# Altium PCB KUOZHAN.PCBDOC (part 2 of 21)
Units mm, origin at the board's own origin, x right, y up, seen from the top; angles counter-clockwise.
Board outline 165.51 x 116.38 mm, 2 copper layers (Top Layer, Bottom Layer); 171 components, 245 nets, 894 pads, 298 vias.
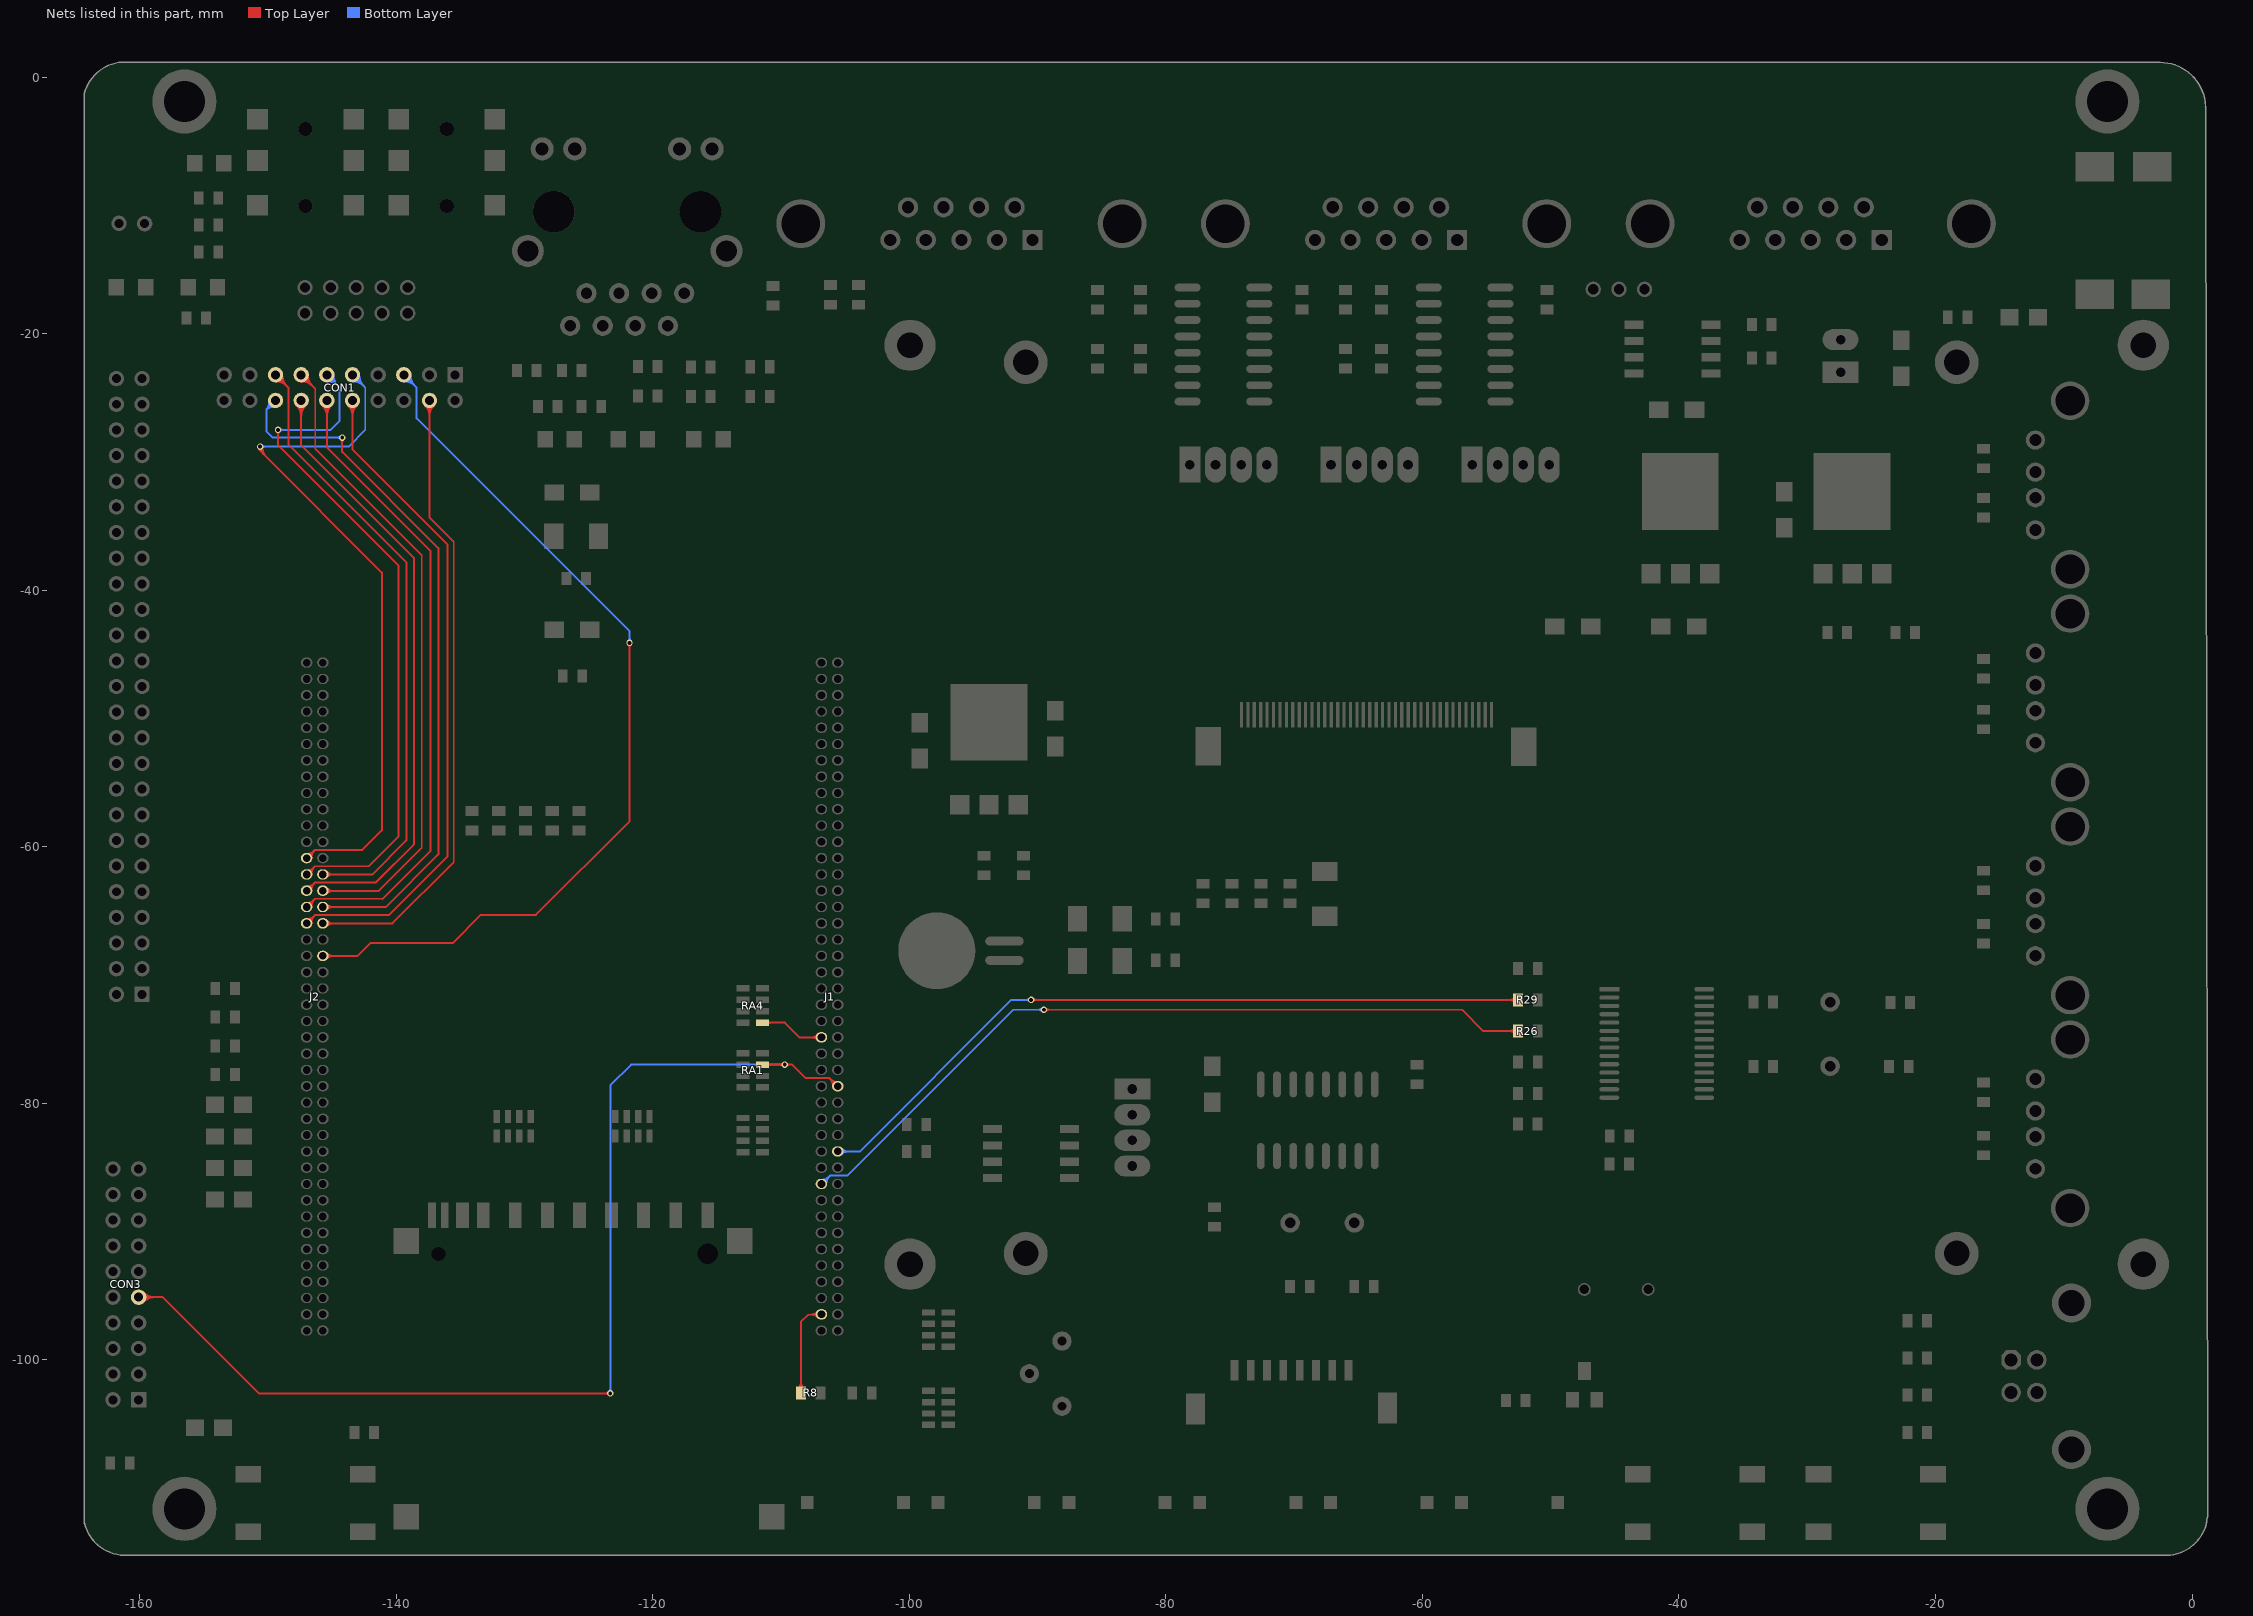
[diagram p2: the nets of this part, all layers, seen from the top]

## Via types
v1: diameter 0.5, hole 0.3, Top Layer to Bottom Layer, 272 vias
v2: diameter 0.6, hole 0.3, Top Layer to Bottom Layer, 24 vias
v3: diameter 0.9, hole 0.9, Top Layer to Bottom Layer, 2 vias

## Nets (pads, with @x,y where several pads share a name; then routed paths per layer and width w, separated by ;. In a path a pad name is that pad's centre, name@x,y a point inside that pad or via, vN(x,y) a via of type N, cw(c..) or ccw(c..) an arc to the next point about the centre after c; other vN are vias at no path point) (continued)
CAMCLK: CON1.5 J2.38 | length 102.6
  Top Layer w0.15: J2.38@-145.703,-68.514 -143.014,-68.514 -142,-67.5 -135.6,-67.5 -133.4,-65.3 -129.1,-65.3 -121.8,-58 v1(-121.8,-44.1) ; v1@-121.888,-44.188 cw(c-122.102,-44.402) -121.8,-44.402 cw(c-121.498,-44.402) v1@-121.712,-44.188 ; J2.38@-145.579,-68.638 cw(c-145.28,-68.937) J2.38@-145.28,-68.514 ; J2.38@-145.579,-68.638 cw(c-145.28,-68.937) J2.38@-145.28,-68.514 ; J2.38@-145.579,-68.638 cw(c-145.28,-68.937) J2.38@-145.28,-68.514 ; J2.38@-145.579,-68.39 ccw(c-145.28,-68.092) J2.38@-145.28,-68.514 ; J2.38@-145.579,-68.39 ccw(c-145.28,-68.092) J2.38@-145.28,-68.514 ; J2.38@-145.579,-68.39 ccw(c-145.28,-68.092) J2.38@-145.28,-68.514 ; J2.38@-145.473,-68.744 cw(c-144.918,-69.299) -144.918,-68.514 ; J2.38@-145.473,-68.744 cw(c-144.918,-69.299) -144.918,-68.514 ; J2.38@-145.473,-68.744 cw(c-144.918,-69.299) -144.918,-68.514 ; J2.38@-145.473,-68.284 ccw(c-144.918,-67.73) -144.918,-68.514 ; J2.38@-145.473,-68.284 ccw(c-144.918,-67.73) -144.918,-68.514 ; J2.38@-145.473,-68.284 ccw(c-144.918,-67.73) -144.918,-68.514 ; v1@-121.924,-44.224 cw(c-122.222,-44.522) -121.8,-44.522 ; v1@-121.924,-44.224 cw(c-122.222,-44.522) -121.8,-44.522 ; v1@-121.924,-44.224 cw(c-122.222,-44.522) -121.8,-44.522 ; v1@-121.924,-44.224 cw(c-122.222,-44.522) -121.8,-44.522 ; -121.8,-44.522 cw(c-121.378,-44.522) v1@-121.676,-44.224 ; -121.8,-44.522 cw(c-121.378,-44.522) v1@-121.676,-44.224 ; -121.8,-44.522 cw(c-121.378,-44.522) v1@-121.676,-44.224 ; -121.8,-44.522 cw(c-121.378,-44.522) v1@-121.676,-44.224 ; J2.38@-145.529,-68.376 ccw(c-145.194,-68.041) -145.194,-68.514 cw(c-145.194,-68.041) J2.38@-145.529,-68.376 ; J2.38@-145.423,-68.729 cw(c-144.904,-69.248) -144.904,-68.514 ccw(c-144.904,-69.248) J2.38@-145.423,-68.729 ; J2.38@-145.423,-68.27 ccw(c-144.832,-67.679) -144.832,-68.514 cw(c-144.832,-67.679) J2.38@-145.423,-68.27
  Bottom Layer w0.15: CON1.5@-139.394,-23.203 -138.4,-24.196 -138.4,-26.6 -121.8,-43.2 v1(-121.8,-44.1) ; v1@-121.888,-44.012 ccw(c-122.102,-43.798) -121.8,-43.798 ccw(c-121.498,-43.798) v1@-121.712,-44.012 ; CON1.5@-139.394,-23.728 cw(c-139.394,-24.995) -138.497,-24.099 ; CON1.5@-139.394,-23.728 cw(c-139.394,-24.995) -138.497,-24.099 ; CON1.5@-139.394,-23.728 cw(c-139.394,-24.995) -138.497,-24.099 ; CON1.5@-139.394,-23.728 cw(c-139.394,-24.995) -138.497,-24.099 ; CON1.5@-139.394,-23.728 cw(c-139.394,-24.995) -138.497,-24.099 ; CON1.5@-139.394,-23.578 cw(c-139.394,-24.483) -138.753,-23.843 ; CON1.5@-139.394,-23.578 cw(c-139.394,-24.483) -138.753,-23.843 ; CON1.5@-139.394,-23.578 cw(c-139.394,-24.483) -138.753,-23.843 ; CON1.5@-139.394,-23.578 cw(c-139.394,-24.483) -138.753,-23.843 ; CON1.5@-139.394,-23.578 cw(c-139.394,-24.483) -138.753,-23.843 ; CON1.5@-139.019,-23.203 ccw(c-138.113,-23.203) -138.753,-23.843 ; CON1.5@-139.019,-23.203 ccw(c-138.113,-23.203) -138.753,-23.843 ; CON1.5@-139.019,-23.203 ccw(c-138.113,-23.203) -138.753,-23.843 ; CON1.5@-139.019,-23.203 ccw(c-138.113,-23.203) -138.753,-23.843 ; CON1.5@-139.019,-23.203 ccw(c-138.113,-23.203) -138.753,-23.843 ; CON1.5@-138.869,-23.203 ccw(c-137.601,-23.203) -138.497,-24.099 ; CON1.5@-138.869,-23.203 ccw(c-137.601,-23.203) -138.497,-24.099 ; CON1.5@-138.869,-23.203 ccw(c-137.601,-23.203) -138.497,-24.099 ; CON1.5@-138.869,-23.203 ccw(c-137.601,-23.203) -138.497,-24.099 ; CON1.5@-138.869,-23.203 ccw(c-137.601,-23.203) -138.497,-24.099 ; v1@-121.924,-43.976 ccw(c-122.222,-43.678) -121.8,-43.678 ; v1@-121.924,-43.976 ccw(c-122.222,-43.678) -121.8,-43.678 ; v1@-121.924,-43.976 ccw(c-122.222,-43.678) -121.8,-43.678 ; v1@-121.924,-43.976 ccw(c-122.222,-43.678) -121.8,-43.678 ; -121.8,-43.678 ccw(c-121.378,-43.678) v1@-121.676,-43.976 ; -121.8,-43.678 ccw(c-121.378,-43.678) v1@-121.676,-43.976 ; -121.8,-43.678 ccw(c-121.378,-43.678) v1@-121.676,-43.976 ; -121.8,-43.678 ccw(c-121.378,-43.678) v1@-121.676,-43.976
CAMDATA0: CON1.16 J2.32 | length 81.6
  Top Layer w0.15: J2.32@-145.703,-64.702 -140.815,-64.702 -136.7,-60.586 -136.7,-36.713 -144.2,-29.213 v1(-144.2,-28.1) ; v1@-144.288,-28.188 cw(c-144.502,-28.402) -144.2,-28.402 cw(c-143.898,-28.402) v1@-144.112,-28.188 ; J2.32@-145.579,-64.825 cw(c-145.28,-65.124) J2.32@-145.28,-64.702 ; J2.32@-145.579,-64.825 cw(c-145.28,-65.124) J2.32@-145.28,-64.702 ; J2.32@-145.579,-64.825 cw(c-145.28,-65.124) J2.32@-145.28,-64.702 ; J2.32@-145.579,-64.578 ccw(c-145.28,-64.279) J2.32@-145.28,-64.702 ; J2.32@-145.579,-64.578 ccw(c-145.28,-64.279) J2.32@-145.28,-64.702 ; J2.32@-145.579,-64.578 ccw(c-145.28,-64.279) J2.32@-145.28,-64.702 ; J2.32@-145.473,-64.931 cw(c-144.918,-65.486) -144.918,-64.702 ; J2.32@-145.473,-64.931 cw(c-144.918,-65.486) -144.918,-64.702 ; J2.32@-145.473,-64.931 cw(c-144.918,-65.486) -144.918,-64.702 ; J2.32@-145.473,-64.472 ccw(c-144.918,-63.917) -144.918,-64.702 ; J2.32@-145.473,-64.472 ccw(c-144.918,-63.917) -144.918,-64.702 ; J2.32@-145.473,-64.472 ccw(c-144.918,-63.917) -144.918,-64.702 ; v1@-144.324,-28.224 cw(c-144.622,-28.522) -144.2,-28.522 ; v1@-144.324,-28.224 cw(c-144.622,-28.522) -144.2,-28.522 ; v1@-144.324,-28.224 cw(c-144.622,-28.522) -144.2,-28.522 ; v1@-144.324,-28.224 cw(c-144.622,-28.522) -144.2,-28.522 ; -144.2,-28.522 cw(c-143.778,-28.522) v1@-144.076,-28.224 ; -144.2,-28.522 cw(c-143.778,-28.522) v1@-144.076,-28.224 ; -144.2,-28.522 cw(c-143.778,-28.522) v1@-144.076,-28.224 ; -144.2,-28.522 cw(c-143.778,-28.522) v1@-144.076,-28.224 ; J2.32@-145.529,-64.566 ccw(c-145.201,-64.237) -145.201,-64.702 cw(c-145.201,-64.237) J2.32@-145.529,-64.566 ; J2.32@-145.423,-64.919 cw(c-144.898,-65.444) -144.898,-64.702 ccw(c-144.898,-65.444) J2.32@-145.423,-64.919 ; J2.32@-145.423,-64.46 ccw(c-144.839,-63.875) -144.839,-64.702 cw(c-144.839,-63.875) J2.32@-145.423,-64.46
  Bottom Layer w0.15: CON1.16@-149.394,-25.203 -150.1,-25.909 ; v1@-144.288,-28.188 ccw(c-144.502,-28.402) -144.502,-28.1 ccw(c-144.502,-27.798) v1@-144.288,-28.012 ; v1(-144.2,-28.1) -149.6,-28.1 -150.1,-27.6 -150.1,-25.909 ; -150.1,-25.909 cw(c-149.614,-26.395) CON1.16@-149.489,-25.719 ; -150.1,-25.909 ccw(c-150.586,-25.423) CON1.16@-149.91,-25.298 ; -150.1,-25.909 cw(c-149.614,-26.395) CON1.16@-149.489,-25.719 ; -150.1,-25.909 ccw(c-150.586,-25.423) CON1.16@-149.91,-25.298 ; -150.1,-25.909 cw(c-149.614,-26.395) CON1.16@-149.489,-25.719 ; -150.1,-25.909 ccw(c-150.586,-25.423) CON1.16@-149.91,-25.298 ; -150.1,-25.909 cw(c-149.614,-26.395) CON1.16@-149.489,-25.719 ; -150.1,-25.909 ccw(c-150.586,-25.423) CON1.16@-149.91,-25.298 ; -150.1,-25.909 ccw(c-150.586,-25.423) CON1.16@-149.91,-25.298 ; -150.1,-25.909 cw(c-149.614,-26.395) CON1.16@-149.489,-25.719 ; -149.898,-25.707 cw(c-149.551,-26.055) CON1.16@-149.462,-25.571 ; -149.898,-25.707 ccw(c-150.246,-25.36) CON1.16@-149.762,-25.271 ; -149.898,-25.707 cw(c-149.551,-26.055) CON1.16@-149.462,-25.571 ; -149.898,-25.707 ccw(c-150.246,-25.36) CON1.16@-149.762,-25.271 ; -149.898,-25.707 cw(c-149.551,-26.055) CON1.16@-149.462,-25.571 ; -149.898,-25.707 ccw(c-150.246,-25.36) CON1.16@-149.762,-25.271 ; -149.898,-25.707 cw(c-149.551,-26.055) CON1.16@-149.462,-25.571 ; -149.898,-25.707 ccw(c-150.246,-25.36) CON1.16@-149.762,-25.271 ; -149.898,-25.707 ccw(c-150.246,-25.36) CON1.16@-149.762,-25.271 ; -149.898,-25.707 cw(c-149.551,-26.055) CON1.16@-149.462,-25.571 ; -144.622,-28.1 cw(c-144.622,-28.522) v1@-144.324,-28.224 ; -144.622,-28.1 ccw(c-144.622,-27.678) v1@-144.324,-27.976 ; -144.622,-28.1 cw(c-144.622,-28.522) v1@-144.324,-28.224 ; -144.622,-28.1 ccw(c-144.622,-27.678) v1@-144.324,-27.976 ; -144.622,-28.1 cw(c-144.622,-28.522) v1@-144.324,-28.224 ; -144.622,-28.1 ccw(c-144.622,-27.678) v1@-144.324,-27.976 ; -144.622,-28.1 ccw(c-144.622,-27.678) v1@-144.324,-27.976 ; -144.622,-28.1 cw(c-144.622,-28.522) v1@-144.324,-28.224
CAMDATA1: CON1.15 J2.28 | length 74.1
  Top Layer w0.15: CON1.15@-149.394,-23.203 -148.4,-24.196 -148.4,-28.633 -139.2,-37.833 -139.2,-59.492 -141.868,-62.16 J2.28@-145.703,-62.16 ; CON1.15@-149.394,-23.728 cw(c-149.394,-24.995) -148.497,-24.099 ; CON1.15@-149.394,-23.728 cw(c-149.394,-24.995) -148.497,-24.099 ; CON1.15@-149.394,-23.728 cw(c-149.394,-24.995) -148.497,-24.099 ; CON1.15@-149.394,-23.728 cw(c-149.394,-24.995) -148.497,-24.099 ; CON1.15@-149.394,-23.728 cw(c-149.394,-24.995) -148.497,-24.099 ; CON1.15@-149.394,-23.578 cw(c-149.394,-24.483) -148.753,-23.843 ; CON1.15@-149.394,-23.578 cw(c-149.394,-24.483) -148.753,-23.843 ; CON1.15@-149.394,-23.578 cw(c-149.394,-24.483) -148.753,-23.843 ; CON1.15@-149.394,-23.578 cw(c-149.394,-24.483) -148.753,-23.843 ; CON1.15@-149.394,-23.578 cw(c-149.394,-24.483) -148.753,-23.843 ; CON1.15@-149.019,-23.203 ccw(c-148.113,-23.203) -148.753,-23.843 ; CON1.15@-149.019,-23.203 ccw(c-148.113,-23.203) -148.753,-23.843 ; CON1.15@-149.019,-23.203 ccw(c-148.113,-23.203) -148.753,-23.843 ; CON1.15@-149.019,-23.203 ccw(c-148.113,-23.203) -148.753,-23.843 ; CON1.15@-149.019,-23.203 ccw(c-148.113,-23.203) -148.753,-23.843 ; CON1.15@-148.869,-23.203 ccw(c-147.601,-23.203) -148.497,-24.099 ; CON1.15@-148.869,-23.203 ccw(c-147.601,-23.203) -148.497,-24.099 ; CON1.15@-148.869,-23.203 ccw(c-147.601,-23.203) -148.497,-24.099 ; CON1.15@-148.869,-23.203 ccw(c-147.601,-23.203) -148.497,-24.099 ; CON1.15@-148.869,-23.203 ccw(c-147.601,-23.203) -148.497,-24.099 ; J2.28@-145.579,-62.284 cw(c-145.28,-62.582) J2.28@-145.28,-62.16 ; J2.28@-145.579,-62.284 cw(c-145.28,-62.582) J2.28@-145.28,-62.16 ; J2.28@-145.579,-62.284 cw(c-145.28,-62.582) J2.28@-145.28,-62.16 ; J2.28@-145.579,-62.036 ccw(c-145.28,-61.737) J2.28@-145.28,-62.16 ; J2.28@-145.579,-62.036 ccw(c-145.28,-61.737) J2.28@-145.28,-62.16 ; J2.28@-145.579,-62.036 ccw(c-145.28,-61.737) J2.28@-145.28,-62.16 ; J2.28@-145.473,-62.39 cw(c-144.918,-62.944) -144.918,-62.16 ; J2.28@-145.473,-62.39 cw(c-144.918,-62.944) -144.918,-62.16 ; J2.28@-145.473,-62.39 cw(c-144.918,-62.944) -144.918,-62.16 ; J2.28@-145.473,-61.93 ccw(c-144.918,-61.375) -144.918,-62.16 ; J2.28@-145.473,-61.93 ccw(c-144.918,-61.375) -144.918,-62.16 ; J2.28@-145.473,-61.93 ccw(c-144.918,-61.375) -144.918,-62.16 ; J2.28@-145.529,-62.026 ccw(c-145.205,-61.702) -145.205,-62.16 cw(c-145.205,-61.702) J2.28@-145.529,-62.026 ; J2.28@-145.423,-62.379 cw(c-144.893,-62.909) -144.893,-62.16 ccw(c-144.893,-62.909) J2.28@-145.423,-62.379 ; J2.28@-145.423,-61.92 ccw(c-144.843,-61.34) -144.843,-62.16 cw(c-144.843,-61.34) J2.28@-145.423,-61.92
CAMDATA2: CON1.14 J2.29 | length 78.3
  Top Layer w0.15: CON1.14@-147.394,-25.203 -147.394,-28.706 -138.6,-37.5 -138.6,-59.797 -141.603,-62.8 ; J2.29@-146.973,-63.431 -146.342,-62.8 ; J2.29@-146.973,-63.419 -146.348,-62.794 ; -141.608,-62.794 -146.348,-62.794 ; CON1.14@-147.765,-25.574 cw(c-148.661,-26.47) -147.394,-26.47 ; CON1.14@-147.765,-25.574 cw(c-148.661,-26.47) -147.394,-26.47 ; CON1.14@-147.765,-25.574 cw(c-148.661,-26.47) -147.394,-26.47 ; CON1.14@-147.765,-25.574 cw(c-148.661,-26.47) -147.394,-26.47 ; CON1.14@-147.765,-25.574 cw(c-148.661,-26.47) -147.394,-26.47 ; CON1.14@-147.659,-25.468 cw(c-148.299,-26.108) -147.394,-26.108 ; CON1.14@-147.659,-25.468 cw(c-148.299,-26.108) -147.394,-26.108 ; CON1.14@-147.659,-25.468 cw(c-148.299,-26.108) -147.394,-26.108 ; CON1.14@-147.659,-25.468 cw(c-148.299,-26.108) -147.394,-26.108 ; CON1.14@-147.659,-25.468 cw(c-148.299,-26.108) -147.394,-26.108 ; -147.394,-26.47 cw(c-146.126,-26.47) CON1.14@-147.022,-25.574 ; -147.394,-26.47 cw(c-146.126,-26.47) CON1.14@-147.022,-25.574 ; -147.394,-26.47 cw(c-146.126,-26.47) CON1.14@-147.022,-25.574 ; -147.394,-26.47 cw(c-146.126,-26.47) CON1.14@-147.022,-25.574 ; -147.394,-26.47 cw(c-146.126,-26.47) CON1.14@-147.022,-25.574 ; -147.394,-26.108 cw(c-146.488,-26.108) CON1.14@-147.128,-25.468 ; -147.394,-26.108 cw(c-146.488,-26.108) CON1.14@-147.128,-25.468 ; -147.394,-26.108 cw(c-146.488,-26.108) CON1.14@-147.128,-25.468 ; -147.394,-26.108 cw(c-146.488,-26.108) CON1.14@-147.128,-25.468 ; -147.394,-26.108 cw(c-146.488,-26.108) CON1.14@-147.128,-25.468 ; J2.29@-146.973,-63.256 ccw(c-146.973,-62.833) J2.29@-146.674,-63.132 ; J2.29@-146.973,-63.256 ccw(c-146.973,-62.833) J2.29@-146.674,-63.132 ; J2.29@-146.973,-63.256 ccw(c-146.973,-62.833) J2.29@-146.674,-63.132 ; J2.29@-146.973,-63.106 ccw(c-146.973,-62.321) -146.418,-62.876 ; J2.29@-146.973,-63.106 ccw(c-146.973,-62.321) -146.418,-62.876 ; J2.29@-146.973,-63.106 ccw(c-146.973,-62.321) -146.418,-62.876 ; J2.29@-146.923,-63.094 ccw(c-146.923,-62.403) -146.434,-62.892 cw(c-146.923,-62.403) J2.29@-146.923,-63.094 ; J2.29@-146.923,-63.094 ccw(c-146.923,-62.43) -146.453,-62.9 cw(c-146.923,-62.43) J2.29@-146.923,-63.094 ; J2.29@-146.798,-63.431 cw(c-146.375,-63.431) J2.29@-146.674,-63.132 ; J2.29@-146.798,-63.431 cw(c-146.375,-63.431) J2.29@-146.674,-63.132 ; J2.29@-146.798,-63.431 cw(c-146.375,-63.431) J2.29@-146.674,-63.132 ; J2.29@-146.648,-63.431 cw(c-145.863,-63.431) -146.418,-62.876 ; J2.29@-146.648,-63.431 cw(c-145.863,-63.431) -146.418,-62.876 ; J2.29@-146.648,-63.431 cw(c-145.863,-63.431) -146.418,-62.876 ; -146.348,-62.794 ccw(c-145.744,-63.398) -146.598,-63.414 cw(c-145.744,-63.398) -146.348,-62.794 ; -146.342,-62.8 ccw(c-145.725,-63.417) -146.598,-63.419 cw(c-145.725,-63.417) -146.342,-62.8 ; J2.29@-146.748,-63.419 cw(c-146.235,-63.418) -146.598,-63.055 ccw(c-146.235,-63.418) J2.29@-146.748,-63.419 ; J2.29@-146.748,-63.416 cw(c-146.235,-63.407) -146.598,-63.044 ccw(c-146.235,-63.407) J2.29@-146.748,-63.416
CAMDATA3: CON1.13 J2.30 | length 75.8
  Top Layer w0.15: CON1.13@-147.394,-23.203 -146.3,-24.296 -146.3,-28.951 -138,-37.251 -138,-60.089 -141.342,-63.431 J2.30@-145.703,-63.431 ; CON1.13@-147.394,-23.728 cw(c-147.394,-24.995) -146.497,-24.099 ; CON1.13@-147.394,-23.728 cw(c-147.394,-24.995) -146.497,-24.099 ; CON1.13@-147.394,-23.728 cw(c-147.394,-24.995) -146.497,-24.099 ; CON1.13@-147.394,-23.728 cw(c-147.394,-24.995) -146.497,-24.099 ; CON1.13@-147.394,-23.728 cw(c-147.394,-24.995) -146.497,-24.099 ; CON1.13@-147.394,-23.578 cw(c-147.394,-24.483) -146.753,-23.843 ; CON1.13@-147.394,-23.578 cw(c-147.394,-24.483) -146.753,-23.843 ; CON1.13@-147.394,-23.578 cw(c-147.394,-24.483) -146.753,-23.843 ; CON1.13@-147.394,-23.578 cw(c-147.394,-24.483) -146.753,-23.843 ; CON1.13@-147.394,-23.578 cw(c-147.394,-24.483) -146.753,-23.843 ; CON1.13@-147.019,-23.203 ccw(c-146.113,-23.203) -146.753,-23.843 ; CON1.13@-147.019,-23.203 ccw(c-146.113,-23.203) -146.753,-23.843 ; CON1.13@-147.019,-23.203 ccw(c-146.113,-23.203) -146.753,-23.843 ; CON1.13@-147.019,-23.203 ccw(c-146.113,-23.203) -146.753,-23.843 ; CON1.13@-147.019,-23.203 ccw(c-146.113,-23.203) -146.753,-23.843 ; CON1.13@-146.869,-23.203 ccw(c-145.601,-23.203) -146.497,-24.099 ; CON1.13@-146.869,-23.203 ccw(c-145.601,-23.203) -146.497,-24.099 ; CON1.13@-146.869,-23.203 ccw(c-145.601,-23.203) -146.497,-24.099 ; CON1.13@-146.869,-23.203 ccw(c-145.601,-23.203) -146.497,-24.099 ; CON1.13@-146.869,-23.203 ccw(c-145.601,-23.203) -146.497,-24.099 ; J2.30@-145.579,-63.554 cw(c-145.28,-63.853) J2.30@-145.28,-63.431 ; J2.30@-145.579,-63.554 cw(c-145.28,-63.853) J2.30@-145.28,-63.431 ; J2.30@-145.579,-63.554 cw(c-145.28,-63.853) J2.30@-145.28,-63.431 ; J2.30@-145.579,-63.307 ccw(c-145.28,-63.008) J2.30@-145.28,-63.431 ; J2.30@-145.579,-63.307 ccw(c-145.28,-63.008) J2.30@-145.28,-63.431 ; J2.30@-145.579,-63.307 ccw(c-145.28,-63.008) J2.30@-145.28,-63.431 ; J2.30@-145.473,-63.661 cw(c-144.918,-64.215) -144.918,-63.431 ; J2.30@-145.473,-63.661 cw(c-144.918,-64.215) -144.918,-63.431 ; J2.30@-145.473,-63.661 cw(c-144.918,-64.215) -144.918,-63.431 ; J2.30@-145.473,-63.201 ccw(c-144.918,-62.646) -144.918,-63.431 ; J2.30@-145.473,-63.201 ccw(c-144.918,-62.646) -144.918,-63.431 ; J2.30@-145.473,-63.201 ccw(c-144.918,-62.646) -144.918,-63.431 ; J2.30@-145.529,-63.296 ccw(c-145.203,-62.97) -145.203,-63.431 cw(c-145.203,-62.97) J2.30@-145.529,-63.296 ; J2.30@-145.423,-63.649 cw(c-144.896,-64.177) -144.896,-63.431 ccw(c-144.896,-64.177) J2.30@-145.423,-63.649 ; J2.30@-145.423,-63.19 ccw(c-144.841,-62.607) -144.841,-63.431 cw(c-144.841,-62.607) J2.30@-145.423,-63.19
CAMDATA4: CON1.12 J2.31 | length 80.1
  Top Layer w0.15: J2.31@-146.973,-64.702 -146.348,-64.077 ; J2.31@-146.973,-64.689 -146.328,-64.044 -141.106,-64.044 ; CON1.12@-145.394,-25.203 -145.394,-28.868 -137.3,-36.962 -137.3,-60.303 -141.074,-64.077 ; J2.31@-146.973,-64.527 ccw(c-146.973,-64.104) J2.31@-146.674,-64.403 ; J2.31@-146.973,-64.527 ccw(c-146.973,-64.104) J2.31@-146.674,-64.403 ; J2.31@-146.973,-64.527 ccw(c-146.973,-64.104) J2.31@-146.674,-64.403 ; J2.31@-146.973,-64.377 ccw(c-146.973,-63.592) -146.418,-64.147 ; J2.31@-146.973,-64.377 ccw(c-146.973,-63.592) -146.418,-64.147 ; J2.31@-146.973,-64.377 ccw(c-146.973,-63.592) -146.418,-64.147 ; J2.31@-146.923,-64.364 ccw(c-146.923,-63.671) -146.432,-64.161 cw(c-146.923,-63.671) J2.31@-146.923,-64.364 ; J2.31@-146.923,-64.364 ccw(c-146.923,-63.7) -146.453,-64.17 cw(c-146.923,-63.7) J2.31@-146.923,-64.364 ; J2.31@-146.798,-64.702 cw(c-146.375,-64.702) J2.31@-146.674,-64.403 ; J2.31@-146.798,-64.702 cw(c-146.375,-64.702) J2.31@-146.674,-64.403 ; J2.31@-146.798,-64.702 cw(c-146.375,-64.702) J2.31@-146.674,-64.403 ; J2.31@-146.648,-64.702 cw(c-145.863,-64.702) -146.418,-64.147 ; J2.31@-146.648,-64.702 cw(c-145.863,-64.702) -146.418,-64.147 ; J2.31@-146.648,-64.702 cw(c-145.863,-64.702) -146.418,-64.147 ; -146.348,-64.077 ccw(c-145.744,-64.68) -146.598,-64.687 cw(c-145.744,-64.68) -146.348,-64.077 ; CON1.12@-145.765,-25.574 cw(c-146.661,-26.47) -145.394,-26.47 ; CON1.12@-145.765,-25.574 cw(c-146.661,-26.47) -145.394,-26.47 ; CON1.12@-145.765,-25.574 cw(c-146.661,-26.47) -145.394,-26.47 ; CON1.12@-145.765,-25.574 cw(c-146.661,-26.47) -145.394,-26.47 ; CON1.12@-145.765,-25.574 cw(c-146.661,-26.47) -145.394,-26.47 ; CON1.12@-145.659,-25.468 cw(c-146.299,-26.108) -145.394,-26.108 ; CON1.12@-145.659,-25.468 cw(c-146.299,-26.108) -145.394,-26.108 ; CON1.12@-145.659,-25.468 cw(c-146.299,-26.108) -145.394,-26.108 ; CON1.12@-145.659,-25.468 cw(c-146.299,-26.108) -145.394,-26.108 ; CON1.12@-145.659,-25.468 cw(c-146.299,-26.108) -145.394,-26.108 ; -145.394,-26.47 cw(c-144.126,-26.47) CON1.12@-145.022,-25.574 ; -145.394,-26.47 cw(c-144.126,-26.47) CON1.12@-145.022,-25.574 ; -145.394,-26.47 cw(c-144.126,-26.47) CON1.12@-145.022,-25.574 ; -145.394,-26.47 cw(c-144.126,-26.47) CON1.12@-145.022,-25.574 ; -145.394,-26.47 cw(c-144.126,-26.47) CON1.12@-145.022,-25.574 ; -145.394,-26.108 cw(c-144.488,-26.108) CON1.12@-145.128,-25.468 ; -145.394,-26.108 cw(c-144.488,-26.108) CON1.12@-145.128,-25.468 ; -145.394,-26.108 cw(c-144.488,-26.108) CON1.12@-145.128,-25.468 ; -145.394,-26.108 cw(c-144.488,-26.108) CON1.12@-145.128,-25.468 ; -145.394,-26.108 cw(c-144.488,-26.108) CON1.12@-145.128,-25.468 ; J2.31@-146.748,-64.689 cw(c-146.205,-64.689) -146.589,-64.305 ccw(c-146.205,-64.689) J2.31@-146.748,-64.689 ; J2.31@-146.748,-64.688 cw(c-146.247,-64.684) -146.601,-64.33 ccw(c-146.247,-64.684) J2.31@-146.748,-64.688 ; J2.31@-146.598,-64.689 cw(c-145.692,-64.689) -146.333,-64.049 ccw(c-145.692,-64.689) J2.31@-146.598,-64.689
CAMDATA5: CON1.11 J2.27 | length 85.4
  Top Layer w0.15: v1@-149.288,-27.588 cw(c-149.502,-27.802) -149.2,-27.802 cw(c-148.898,-27.802) v1@-149.112,-27.588 ; v1(-149.2,-27.5) -149.2,-28.682 -139.8,-38.082 -139.8,-59.178 -142.135,-61.514 -146.327,-61.514 J2.27@-146.973,-62.16 ; v1@-149.324,-27.624 cw(c-149.622,-27.922) -149.2,-27.922 ; v1@-149.324,-27.624 cw(c-149.622,-27.922) -149.2,-27.922 ; v1@-149.324,-27.624 cw(c-149.622,-27.922) -149.2,-27.922 ; v1@-149.324,-27.624 cw(c-149.622,-27.922) -149.2,-27.922 ; -149.2,-27.922 cw(c-148.778,-27.922) v1@-149.076,-27.624 ; -149.2,-27.922 cw(c-148.778,-27.922) v1@-149.076,-27.624 ; -149.2,-27.922 cw(c-148.778,-27.922) v1@-149.076,-27.624 ; -149.2,-27.922 cw(c-148.778,-27.922) v1@-149.076,-27.624 ; J2.27@-146.973,-61.985 ccw(c-146.973,-61.562) J2.27@-146.674,-61.861 ; J2.27@-146.973,-61.985 ccw(c-146.973,-61.562) J2.27@-146.674,-61.861 ; J2.27@-146.973,-61.985 ccw(c-146.973,-61.562) J2.27@-146.674,-61.861 ; J2.27@-146.973,-61.835 ccw(c-146.973,-61.05) -146.418,-61.605 ; J2.27@-146.973,-61.835 ccw(c-146.973,-61.05) -146.418,-61.605 ; J2.27@-146.973,-61.835 ccw(c-146.973,-61.05) -146.418,-61.605 ; J2.27@-146.798,-62.16 cw(c-146.375,-62.16) J2.27@-146.674,-61.861 ; J2.27@-146.798,-62.16 cw(c-146.375,-62.16) J2.27@-146.674,-61.861 ; J2.27@-146.798,-62.16 cw(c-146.375,-62.16) J2.27@-146.674,-61.861 ; J2.27@-146.648,-62.16 cw(c-145.863,-62.16) -146.418,-61.605 ; J2.27@-146.648,-62.16 cw(c-145.863,-62.16) -146.418,-61.605 ; J2.27@-146.648,-62.16 cw(c-145.863,-62.16) -146.418,-61.605 ; J2.27@-146.923,-61.824 ccw(c-146.923,-61.135) -146.435,-61.623 cw(c-146.923,-61.135) J2.27@-146.923,-61.824 ; J2.27@-146.748,-62.149 cw(c-146.23,-62.149) -146.596,-61.783 ccw(c-146.23,-62.149) J2.27@-146.748,-62.149 ; J2.27@-146.598,-62.149 cw(c-145.718,-62.149) -146.34,-61.527 ccw(c-145.718,-62.149) J2.27@-146.598,-62.149
  Bottom Layer w0.15: v1(-149.2,-27.5) -145.1,-27.5 -144.4,-26.8 -144.4,-24.196 CON1.11@-145.394,-23.203 ; v1@-149.112,-27.588 cw(c-148.898,-27.802) -148.898,-27.5 cw(c-148.898,-27.198) v1@-149.112,-27.412 ; v1@-149.076,-27.624 cw(c-148.778,-27.922) -148.778,-27.5 ; v1@-149.076,-27.624 cw(c-148.778,-27.922) -148.778,-27.5 ; v1@-149.076,-27.624 cw(c-148.778,-27.922) -148.778,-27.5 ; v1@-149.076,-27.624 cw(c-148.778,-27.922) -148.778,-27.5 ; v1@-149.076,-27.376 ccw(c-148.778,-27.078) -148.778,-27.5 ; v1@-149.076,-27.376 ccw(c-148.778,-27.078) -148.778,-27.5 ; v1@-149.076,-27.376 ccw(c-148.778,-27.078) -148.778,-27.5 ; v1@-149.076,-27.376 ccw(c-148.778,-27.078) -148.778,-27.5 ; CON1.11@-145.394,-23.728 cw(c-145.394,-24.995) -144.497,-24.099 ; CON1.11@-145.394,-23.728 cw(c-145.394,-24.995) -144.497,-24.099 ; CON1.11@-145.394,-23.728 cw(c-145.394,-24.995) -144.497,-24.099 ; CON1.11@-145.394,-23.728 cw(c-145.394,-24.995) -144.497,-24.099 ; CON1.11@-145.394,-23.728 cw(c-145.394,-24.995) -144.497,-24.099 ; CON1.11@-145.394,-23.578 cw(c-145.394,-24.483) -144.753,-23.843 ; CON1.11@-145.394,-23.578 cw(c-145.394,-24.483) -144.753,-23.843 ; CON1.11@-145.394,-23.578 cw(c-145.394,-24.483) -144.753,-23.843 ; CON1.11@-145.394,-23.578 cw(c-145.394,-24.483) -144.753,-23.843 ; CON1.11@-145.394,-23.578 cw(c-145.394,-24.483) -144.753,-23.843 ; CON1.11@-145.019,-23.203 ccw(c-144.113,-23.203) -144.753,-23.843 ; CON1.11@-145.019,-23.203 ccw(c-144.113,-23.203) -144.753,-23.843 ; CON1.11@-145.019,-23.203 ccw(c-144.113,-23.203) -144.753,-23.843 ; CON1.11@-145.019,-23.203 ccw(c-144.113,-23.203) -144.753,-23.843 ; CON1.11@-145.019,-23.203 ccw(c-144.113,-23.203) -144.753,-23.843 ; CON1.11@-144.869,-23.203 ccw(c-143.601,-23.203) -144.497,-24.099 ; CON1.11@-144.869,-23.203 ccw(c-143.601,-23.203) -144.497,-24.099 ; CON1.11@-144.869,-23.203 ccw(c-143.601,-23.203) -144.497,-24.099 ; CON1.11@-144.869,-23.203 ccw(c-143.601,-23.203) -144.497,-24.099 ; CON1.11@-144.869,-23.203 ccw(c-143.601,-23.203) -144.497,-24.099
CAMDATA6: CON1.10 J2.33 | length 77.8
  Top Layer w0.15: J2.33@-146.973,-65.972 -146.327,-65.327 -140.556,-65.327 -136,-60.77 -136,-36.423 -138.1,-34.323 -143.394,-29.029 CON1.10@-143.394,-25.203 ; J2.33@-146.973,-65.797 ccw(c-146.973,-65.375) J2.33@-146.674,-65.674 ; J2.33@-146.973,-65.797 ccw(c-146.973,-65.375) J2.33@-146.674,-65.674 ; J2.33@-146.973,-65.797 ccw(c-146.973,-65.375) J2.33@-146.674,-65.674 ; J2.33@-146.973,-65.647 ccw(c-146.973,-64.863) -146.418,-65.418 ; J2.33@-146.973,-65.647 ccw(c-146.973,-64.863) -146.418,-65.418 ; J2.33@-146.973,-65.647 ccw(c-146.973,-64.863) -146.418,-65.418 ; J2.33@-146.798,-65.972 cw(c-146.375,-65.972) J2.33@-146.674,-65.674 ; J2.33@-146.798,-65.972 cw(c-146.375,-65.972) J2.33@-146.674,-65.674 ; J2.33@-146.798,-65.972 cw(c-146.375,-65.972) J2.33@-146.674,-65.674 ; J2.33@-146.648,-65.972 cw(c-145.863,-65.972) -146.418,-65.418 ; J2.33@-146.648,-65.972 cw(c-145.863,-65.972) -146.418,-65.418 ; J2.33@-146.648,-65.972 cw(c-145.863,-65.972) -146.418,-65.418 ; CON1.10@-143.765,-25.574 cw(c-144.661,-26.47) -143.394,-26.47 ; CON1.10@-143.765,-25.574 cw(c-144.661,-26.47) -143.394,-26.47 ; CON1.10@-143.765,-25.574 cw(c-144.661,-26.47) -143.394,-26.47 ; CON1.10@-143.765,-25.574 cw(c-144.661,-26.47) -143.394,-26.47 ; CON1.10@-143.765,-25.574 cw(c-144.661,-26.47) -143.394,-26.47 ; CON1.10@-143.659,-25.468 cw(c-144.299,-26.108) -143.394,-26.108 ; CON1.10@-143.659,-25.468 cw(c-144.299,-26.108) -143.394,-26.108 ; CON1.10@-143.659,-25.468 cw(c-144.299,-26.108) -143.394,-26.108 ; CON1.10@-143.659,-25.468 cw(c-144.299,-26.108) -143.394,-26.108 ; CON1.10@-143.659,-25.468 cw(c-144.299,-26.108) -143.394,-26.108 ; -143.394,-26.47 cw(c-142.126,-26.47) CON1.10@-143.022,-25.574 ; -143.394,-26.47 cw(c-142.126,-26.47) CON1.10@-143.022,-25.574 ; -143.394,-26.47 cw(c-142.126,-26.47) CON1.10@-143.022,-25.574 ; -143.394,-26.47 cw(c-142.126,-26.47) CON1.10@-143.022,-25.574 ; -143.394,-26.47 cw(c-142.126,-26.47) CON1.10@-143.022,-25.574 ; -143.394,-26.108 cw(c-142.488,-26.108) CON1.10@-143.128,-25.468 ; -143.394,-26.108 cw(c-142.488,-26.108) CON1.10@-143.128,-25.468 ; -143.394,-26.108 cw(c-142.488,-26.108) CON1.10@-143.128,-25.468 ; -143.394,-26.108 cw(c-142.488,-26.108) CON1.10@-143.128,-25.468 ; -143.394,-26.108 cw(c-142.488,-26.108) CON1.10@-143.128,-25.468 ; J2.33@-146.923,-65.634 ccw(c-146.923,-64.939) -146.431,-65.431 cw(c-146.923,-64.939) J2.33@-146.923,-65.634 ; J2.33@-146.748,-65.959 cw(c-146.236,-65.959) -146.598,-65.598 ccw(c-146.236,-65.959) J2.33@-146.748,-65.959 ; J2.33@-146.598,-65.959 cw(c-145.724,-65.959) -146.342,-65.342 ccw(c-145.724,-65.959) J2.33@-146.598,-65.959
CAMDATA7: CON1.9 J2.25 | length 95.7
  Top Layer w0.15: v1@-150.688,-28.888 cw(c-150.902,-29.102) -150.6,-29.102 cw(c-150.298,-29.102) v1@-150.512,-28.888 ; v1(-150.6,-28.8) -150.6,-29.12 -141.1,-38.62 -141.1,-58.711 -142.624,-60.234 -146.328,-60.234 J2.25@-146.973,-60.879 ; J2.25@-146.973,-60.889 -146.348,-60.264 ; v1@-150.725,-28.8 ccw(c-150.254,-28.8) -150.587,-29.133 ; v1@-150.725,-28.8 ccw(c-150.254,-28.8) -150.587,-29.133 ; v1@-150.725,-28.8 ccw(c-150.254,-28.8) -150.587,-29.133 ; v1@-150.725,-28.8 ccw(c-150.254,-28.8) -150.587,-29.133 ; v1@-150.575,-28.8 ccw(c-149.742,-28.8) -150.331,-29.389 ; v1@-150.575,-28.8 ccw(c-149.742,-28.8) -150.331,-29.389 ; v1@-150.575,-28.8 ccw(c-149.742,-28.8) -150.331,-29.389 ; v1@-150.575,-28.8 ccw(c-149.742,-28.8) -150.331,-29.389 ; v1@-150.425,-28.8 ccw(c-149.23,-28.8) -150.075,-29.645 ; v1@-150.425,-28.8 ccw(c-149.23,-28.8) -150.075,-29.645 ; v1@-150.425,-28.8 ccw(c-149.23,-28.8) -150.075,-29.645 ; v1@-150.425,-28.8 ccw(c-149.23,-28.8) -150.075,-29.645 ; J2.25@-146.973,-60.714 ccw(c-146.973,-60.291) J2.25@-146.674,-60.59 ; J2.25@-146.973,-60.714 ccw(c-146.973,-60.291) J2.25@-146.674,-60.59 ; J2.25@-146.973,-60.714 ccw(c-146.973,-60.291) J2.25@-146.674,-60.59 ; J2.25@-146.973,-60.564 ccw(c-146.973,-59.779) -146.418,-60.334 ; J2.25@-146.973,-60.564 ccw(c-146.973,-59.779) -146.418,-60.334 ; J2.25@-146.973,-60.564 ccw(c-146.973,-59.779) -146.418,-60.334 ; J2.25@-146.923,-60.554 ccw(c-146.923,-59.867) -146.437,-60.353 cw(c-146.923,-59.867) J2.25@-146.923,-60.554 ; J2.25@-146.923,-60.554 ccw(c-146.923,-59.89) -146.453,-60.36 cw(c-146.923,-59.89) J2.25@-146.923,-60.554 ; J2.25@-146.798,-60.889 cw(c-146.375,-60.889) J2.25@-146.674,-60.59 ; J2.25@-146.798,-60.889 cw(c-146.375,-60.889) J2.25@-146.674,-60.59 ; J2.25@-146.798,-60.889 cw(c-146.375,-60.889) J2.25@-146.674,-60.59 ; J2.25@-146.648,-60.889 cw(c-145.863,-60.889) -146.418,-60.334 ; J2.25@-146.648,-60.889 cw(c-145.863,-60.889) -146.418,-60.334 ; J2.25@-146.648,-60.889 cw(c-145.863,-60.889) -146.418,-60.334 ; -146.348,-60.264 ccw(c-145.744,-60.868) -146.598,-60.876 cw(c-145.744,-60.868) -146.348,-60.264 ; J2.25@-146.748,-60.879 cw(c-146.205,-60.879) -146.589,-60.495 ccw(c-146.205,-60.879) J2.25@-146.748,-60.879 ; J2.25@-146.748,-60.878 cw(c-146.244,-60.873) -146.6,-60.516 ccw(c-146.244,-60.873) J2.25@-146.748,-60.878 ; J2.25@-146.598,-60.879 cw(c-145.692,-60.879) -146.333,-60.239 ccw(c-145.692,-60.879) J2.25@-146.598,-60.879
  Bottom Layer w0.15: v1(-150.6,-28.8) -143.7,-28.8 -142.4,-27.5 -142.4,-24.196 CON1.9@-143.394,-23.203 ; v1@-150.512,-28.888 cw(c-150.298,-29.102) -150.298,-28.8 cw(c-150.298,-28.498) v1@-150.512,-28.712 ; v1@-150.476,-28.924 cw(c-150.178,-29.222) -150.178,-28.8 ; v1@-150.476,-28.924 cw(c-150.178,-29.222) -150.178,-28.8 ; v1@-150.476,-28.924 cw(c-150.178,-29.222) -150.178,-28.8 ; v1@-150.476,-28.924 cw(c-150.178,-29.222) -150.178,-28.8 ; v1@-150.476,-28.676 ccw(c-150.178,-28.378) -150.178,-28.8 ; v1@-150.476,-28.676 ccw(c-150.178,-28.378) -150.178,-28.8 ; v1@-150.476,-28.676 ccw(c-150.178,-28.378) -150.178,-28.8 ; v1@-150.476,-28.676 ccw(c-150.178,-28.378) -150.178,-28.8 ; CON1.9@-143.394,-23.728 cw(c-143.394,-24.995) -142.497,-24.099 ; CON1.9@-143.394,-23.728 cw(c-143.394,-24.995) -142.497,-24.099 ; CON1.9@-143.394,-23.728 cw(c-143.394,-24.995) -142.497,-24.099 ; CON1.9@-143.394,-23.728 cw(c-143.394,-24.995) -142.497,-24.099 ; CON1.9@-143.394,-23.728 cw(c-143.394,-24.995) -142.497,-24.099 ; CON1.9@-143.394,-23.578 cw(c-143.394,-24.483) -142.753,-23.843 ; CON1.9@-143.394,-23.578 cw(c-143.394,-24.483) -142.753,-23.843 ; CON1.9@-143.394,-23.578 cw(c-143.394,-24.483) -142.753,-23.843 ; CON1.9@-143.394,-23.578 cw(c-143.394,-24.483) -142.753,-23.843 ; CON1.9@-143.394,-23.578 cw(c-143.394,-24.483) -142.753,-23.843 ; CON1.9@-143.019,-23.203 ccw(c-142.113,-23.203) -142.753,-23.843 ; CON1.9@-143.019,-23.203 ccw(c-142.113,-23.203) -142.753,-23.843 ; CON1.9@-143.019,-23.203 ccw(c-142.113,-23.203) -142.753,-23.843 ; CON1.9@-143.019,-23.203 ccw(c-142.113,-23.203) -142.753,-23.843 ; CON1.9@-143.019,-23.203 ccw(c-142.113,-23.203) -142.753,-23.843 ; CON1.9@-142.869,-23.203 ccw(c-141.601,-23.203) -142.497,-24.099 ; CON1.9@-142.869,-23.203 ccw(c-141.601,-23.203) -142.497,-24.099 ; CON1.9@-142.869,-23.203 ccw(c-141.601,-23.203) -142.497,-24.099 ; CON1.9@-142.869,-23.203 ccw(c-141.601,-23.203) -142.497,-24.099 ; CON1.9@-142.869,-23.203 ccw(c-141.601,-23.203) -142.497,-24.099
CAMRST: CON1.4 J2.34 | length 74.9
  Top Layer w0.15: J2.34@-145.703,-65.972 -140.289,-65.972 -135.5,-61.184 -135.5,-36.216 -137.394,-34.322 CON1.4@-137.394,-25.203 ; J2.34@-145.579,-66.096 cw(c-145.28,-66.395) J2.34@-145.28,-65.972 ; J2.34@-145.579,-66.096 cw(c-145.28,-66.395) J2.34@-145.28,-65.972 ; J2.34@-145.579,-66.096 cw(c-145.28,-66.395) J2.34@-145.28,-65.972 ; J2.34@-145.579,-65.849 ccw(c-145.28,-65.55) J2.34@-145.28,-65.972 ; J2.34@-145.579,-65.849 ccw(c-145.28,-65.55) J2.34@-145.28,-65.972 ; J2.34@-145.579,-65.849 ccw(c-145.28,-65.55) J2.34@-145.28,-65.972 ; J2.34@-145.473,-66.202 cw(c-144.918,-66.757) -144.918,-65.972 ; J2.34@-145.473,-66.202 cw(c-144.918,-66.757) -144.918,-65.972 ; J2.34@-145.473,-66.202 cw(c-144.918,-66.757) -144.918,-65.972 ; J2.34@-145.473,-65.743 ccw(c-144.918,-65.188) -144.918,-65.972 ; J2.34@-145.473,-65.743 ccw(c-144.918,-65.188) -144.918,-65.972 ; J2.34@-145.473,-65.743 ccw(c-144.918,-65.188) -144.918,-65.972 ; CON1.4@-137.765,-25.574 cw(c-138.661,-26.47) -137.394,-26.47 ; CON1.4@-137.765,-25.574 cw(c-138.661,-26.47) -137.394,-26.47 ; CON1.4@-137.765,-25.574 cw(c-138.661,-26.47) -137.394,-26.47 ; CON1.4@-137.765,-25.574 cw(c-138.661,-26.47) -137.394,-26.47 ; CON1.4@-137.765,-25.574 cw(c-138.661,-26.47) -137.394,-26.47 ; CON1.4@-137.659,-25.468 cw(c-138.299,-26.108) -137.394,-26.108 ; CON1.4@-137.659,-25.468 cw(c-138.299,-26.108) -137.394,-26.108 ; CON1.4@-137.659,-25.468 cw(c-138.299,-26.108) -137.394,-26.108 ; CON1.4@-137.659,-25.468 cw(c-138.299,-26.108) -137.394,-26.108 ; CON1.4@-137.659,-25.468 cw(c-138.299,-26.108) -137.394,-26.108 ; -137.394,-26.47 cw(c-136.126,-26.47) CON1.4@-137.022,-25.574 ; -137.394,-26.47 cw(c-136.126,-26.47) CON1.4@-137.022,-25.574 ; -137.394,-26.47 cw(c-136.126,-26.47) CON1.4@-137.022,-25.574 ; -137.394,-26.47 cw(c-136.126,-26.47) CON1.4@-137.022,-25.574 ; -137.394,-26.47 cw(c-136.126,-26.47) CON1.4@-137.022,-25.574 ; -137.394,-26.108 cw(c-136.488,-26.108) CON1.4@-137.128,-25.468 ; -137.394,-26.108 cw(c-136.488,-26.108) CON1.4@-137.128,-25.468 ; -137.394,-26.108 cw(c-136.488,-26.108) CON1.4@-137.128,-25.468 ; -137.394,-26.108 cw(c-136.488,-26.108) CON1.4@-137.128,-25.468 ; -137.394,-26.108 cw(c-136.488,-26.108) CON1.4@-137.128,-25.468 ; J2.34@-145.529,-65.836 ccw(c-145.199,-65.505) -145.199,-65.972 cw(c-145.199,-65.505) J2.34@-145.529,-65.836 ; J2.34@-145.423,-66.189 cw(c-144.9,-66.712) -144.9,-65.972 ccw(c-144.9,-66.712) J2.34@-145.423,-66.189 ; J2.34@-145.423,-65.73 ccw(c-144.837,-65.143) -144.837,-65.972 cw(c-144.837,-65.143) J2.34@-145.423,-65.73
CLKOUT0: J1.81 R8.2 | length 22.2
  Top Layer w0.15: R8.2@-108.437,-102.56 -108.437,-100.163 -108.437,-97.037 -107.874,-96.474 J1.81@-106.841,-96.474 ; R8.2@-108.653,-102.216 ccw(c-109.175,-101.694) -108.437,-101.694 ; R8.2@-108.653,-102.216 ccw(c-109.175,-101.694) -108.437,-101.694 ; R8.2@-108.653,-102.216 ccw(c-109.175,-101.694) -108.437,-101.694 ; R8.2@-108.653,-102.216 ccw(c-109.175,-101.694) -108.437,-101.694 ; R8.2@-108.653,-102.216 ccw(c-109.175,-101.694) -108.437,-101.694 ; -108.437,-101.694 ccw(c-107.698,-101.694) R8.2@-108.22,-102.216 ; -108.437,-101.694 ccw(c-107.698,-101.694) R8.2@-108.22,-102.216 ; -108.437,-101.694 ccw(c-107.698,-101.694) R8.2@-108.22,-102.216 ; -108.437,-101.694 ccw(c-107.698,-101.694) R8.2@-108.22,-102.216 ; -108.437,-101.694 ccw(c-107.698,-101.694) R8.2@-108.22,-102.216 ; -107.625,-96.474 cw(c-107.625,-97.258) J1.81@-107.071,-96.703 ; -107.625,-96.474 ccw(c-107.625,-95.689) J1.81@-107.071,-96.244 ; -107.625,-96.474 cw(c-107.625,-97.258) J1.81@-107.071,-96.703 ; -107.625,-96.474 ccw(c-107.625,-95.689) J1.81@-107.071,-96.244 ; -107.625,-96.474 cw(c-107.625,-97.258) J1.81@-107.071,-96.703 ; -107.625,-96.474 ccw(c-107.625,-95.689) J1.81@-107.071,-96.244 ; J1.81@-107.263,-96.474 cw(c-107.263,-96.896) J1.81@-106.965,-96.597 ; J1.81@-107.263,-96.474 ccw(c-107.263,-96.051) J1.81@-106.965,-96.35 ; J1.81@-107.263,-96.474 cw(c-107.263,-96.896) J1.81@-106.965,-96.597 ; J1.81@-107.263,-96.474 ccw(c-107.263,-96.051) J1.81@-106.965,-96.35 ; J1.81@-107.263,-96.474 cw(c-107.263,-96.896) J1.81@-106.965,-96.597 ; J1.81@-107.263,-96.474 ccw(c-107.263,-96.051) J1.81@-106.965,-96.35 ; -107.758,-96.474 ccw(c-107.758,-95.572) -107.121,-96.209 cw(c-107.758,-95.572) -107.758,-96.474 ; -107.593,-96.474 cw(c-107.593,-97.141) -107.121,-96.669 ccw(c-107.593,-97.141) -107.593,-96.474 ; -107.396,-96.474 ccw(c-107.396,-95.934) -107.015,-96.316 cw(c-107.396,-95.934) -107.396,-96.474
CLKOUT1: J1.47 RA4.1 | length 17.3
  Top Layer w0.15: RA4.1@-111.42,-73.704 -109.696,-73.704 -108.531,-74.869 J1.47@-106.841,-74.869 ; RA4.1@-111.038,-73.828 cw(c-110.739,-74.126) -110.739,-73.704 ; RA4.1@-111.038,-73.828 cw(c-110.739,-74.126) -110.739,-73.704 ; RA4.1@-111.038,-73.828 cw(c-110.739,-74.126) -110.739,-73.704 ; RA4.1@-111.038,-73.828 cw(c-110.739,-74.126) -110.739,-73.704 ; RA4.1@-111.038,-73.828 cw(c-110.739,-74.126) -110.739,-73.704 ; RA4.1@-111.038,-73.58 ccw(c-110.739,-73.281) -110.739,-73.704 ; RA4.1@-111.038,-73.58 ccw(c-110.739,-73.281) -110.739,-73.704 ; RA4.1@-111.038,-73.58 ccw(c-110.739,-73.281) -110.739,-73.704 ; RA4.1@-111.038,-73.58 ccw(c-110.739,-73.281) -110.739,-73.704 ; RA4.1@-111.038,-73.58 ccw(c-110.739,-73.281) -110.739,-73.704 ; -107.625,-74.869 cw(c-107.625,-75.653) J1.47@-107.071,-75.098 ; -107.625,-74.869 ccw(c-107.625,-74.084) J1.47@-107.071,-74.639 ; -107.625,-74.869 cw(c-107.625,-75.653) J1.47@-107.071,-75.098 ; -107.625,-74.869 ccw(c-107.625,-74.084) J1.47@-107.071,-74.639 ; -107.625,-74.869 cw(c-107.625,-75.653) J1.47@-107.071,-75.098 ; -107.625,-74.869 ccw(c-107.625,-74.084) J1.47@-107.071,-74.639 ; J1.47@-107.263,-74.869 cw(c-107.263,-75.291) J1.47@-106.965,-74.992 ; J1.47@-107.263,-74.869 ccw(c-107.263,-74.446) J1.47@-106.965,-74.745 ; J1.47@-107.263,-74.869 cw(c-107.263,-75.291) J1.47@-106.965,-74.992 ; J1.47@-107.263,-74.869 ccw(c-107.263,-74.446) J1.47@-106.965,-74.745 ; J1.47@-107.263,-74.869 cw(c-107.263,-75.291) J1.47@-106.965,-74.992 ; J1.47@-107.263,-74.869 ccw(c-107.263,-74.446) J1.47@-106.965,-74.745 ; -107.722,-74.869 ccw(c-107.722,-74.018) -107.121,-74.62 cw(c-107.722,-74.018) -107.722,-74.869 ; -107.629,-74.869 cw(c-107.629,-75.587) -107.121,-75.079 ccw(c-107.629,-75.587) -107.629,-74.869 ; -107.36,-74.869 ccw(c-107.36,-74.38) -107.015,-74.726 cw(c-107.36,-74.38) -107.36,-74.869
DN0: J1.65 R26.2 | length 80.9
  Top Layer w0.15: v1(-89.5,-72.7) -56.9,-72.7 -55.243,-74.357 R26.2@-52.537,-74.357 ; v1@-89.376,-72.824 cw(c-89.078,-73.122) -89.078,-72.7 cw(c-89.078,-72.278) v1@-89.376,-72.576 ; -53.275,-74.357 cw(c-53.275,-75.095) R26.2@-52.753,-74.573 ; -53.275,-74.357 ccw(c-53.275,-73.618) R26.2@-52.753,-74.14 ; -53.275,-74.357 cw(c-53.275,-75.095) R26.2@-52.753,-74.573 ; -53.275,-74.357 ccw(c-53.275,-73.618) R26.2@-52.753,-74.14 ; -53.275,-74.357 cw(c-53.275,-75.095) R26.2@-52.753,-74.573 ; -53.275,-74.357 ccw(c-53.275,-73.618) R26.2@-52.753,-74.14 ; -53.275,-74.357 cw(c-53.275,-75.095) R26.2@-52.753,-74.573 ; -53.275,-74.357 ccw(c-53.275,-73.618) R26.2@-52.753,-74.14 ; -53.275,-74.357 ccw(c-53.275,-73.618) R26.2@-52.753,-74.14 ; -53.275,-74.357 cw(c-53.275,-75.095) R26.2@-52.753,-74.573
  Bottom Layer w0.15: J1.65@-106.841,-86.307 -106.195,-85.661 ; J1.65@-106.841,-86.279 -106.196,-85.634 -104.834,-85.634 -91.9,-72.7 v1(-89.5,-72.7) ; v1@-89.624,-72.824 ccw(c-89.922,-73.122) -89.922,-72.7 ccw(c-89.922,-72.278) v1@-89.624,-72.576 ; J1.65@-106.841,-86.132 ccw(c-106.841,-85.709) J1.65@-106.542,-86.008 ; J1.65@-106.841,-86.132 ccw(c-106.841,-85.709) J1.65@-106.542,-86.008 ; J1.65@-106.841,-86.132 ccw(c-106.841,-85.709) J1.65@-106.542,-86.008 ; J1.65@-106.841,-85.982 ccw(c-106.841,-85.197) -106.286,-85.752 ; J1.65@-106.841,-85.982 ccw(c-106.841,-85.197) -106.286,-85.752 ; J1.65@-106.841,-85.982 ccw(c-106.841,-85.197) -106.286,-85.752 ; J1.65@-106.791,-85.954 ccw(c-106.791,-85.29) -106.321,-85.76 cw(c-106.791,-85.29) J1.65@-106.791,-85.954 ; J1.65@-106.791,-85.954 ccw(c-106.791,-85.225) -106.275,-85.741 cw(c-106.791,-85.225) J1.65@-106.791,-85.954 ; J1.65@-106.666,-86.307 cw(c-106.243,-86.307) J1.65@-106.542,-86.008 ; J1.65@-106.666,-86.307 cw(c-106.243,-86.307) J1.65@-106.542,-86.008 ; J1.65@-106.666,-86.307 cw(c-106.243,-86.307) J1.65@-106.542,-86.008 ; J1.65@-106.616,-86.279 cw(c-106.073,-86.279) -106.457,-85.895 ccw(c-106.073,-86.279) J1.65@-106.616,-86.279 ; J1.65@-106.616,-86.279 cw(c-106.138,-86.279) -106.476,-85.942 ccw(c-106.138,-86.279) J1.65@-106.616,-86.279 ; J1.65@-106.516,-86.307 cw(c-105.731,-86.307) -106.286,-85.752 ; J1.65@-106.516,-86.307 cw(c-105.731,-86.307) -106.286,-85.752 ; J1.65@-106.516,-86.307 cw(c-105.731,-86.307) -106.286,-85.752 ; J1.65@-106.466,-86.279 cw(c-105.56,-86.279) -106.201,-85.639 ccw(c-105.56,-86.279) J1.65@-106.466,-86.279 ; J1.65@-106.466,-86.279 cw(c-105.626,-86.279) -106.22,-85.686 ccw(c-105.626,-86.279) J1.65@-106.466,-86.279
DP0: J1.62 R29.2 | length 74
  Top Layer w0.15: v1(-90.5,-71.928) R29.2@-52.537,-71.928 ; v1@-90.376,-72.052 cw(c-90.078,-72.351) -90.078,-71.928 cw(c-90.078,-71.506) v1@-90.376,-71.805 ; -53.275,-71.928 cw(c-53.275,-72.667) R29.2@-52.753,-72.145 ; -53.275,-71.928 ccw(c-53.275,-71.19) R29.2@-52.753,-71.712 ; -53.275,-71.928 cw(c-53.275,-72.667) R29.2@-52.753,-72.145 ; -53.275,-71.928 ccw(c-53.275,-71.19) R29.2@-52.753,-71.712 ; -53.275,-71.928 cw(c-53.275,-72.667) R29.2@-52.753,-72.145 ; -53.275,-71.928 ccw(c-53.275,-71.19) R29.2@-52.753,-71.712 ; -53.275,-71.928 cw(c-53.275,-72.667) R29.2@-52.753,-72.145 ; -53.275,-71.928 ccw(c-53.275,-71.19) R29.2@-52.753,-71.712 ; -53.275,-71.928 ccw(c-53.275,-71.19) R29.2@-52.753,-71.712 ; -53.275,-71.928 cw(c-53.275,-72.667) R29.2@-52.753,-72.145
  Bottom Layer w0.15: J1.62@-105.571,-83.765 -103.865,-83.765 -92.028,-71.928 v1(-90.5,-71.928) ; v1@-90.624,-72.052 ccw(c-90.922,-72.351) -90.922,-71.928 ccw(c-90.922,-71.506) v1@-90.624,-71.805 ; J1.62@-105.447,-83.889 cw(c-105.148,-84.187) J1.62@-105.148,-83.765 ; J1.62@-105.447,-83.889 cw(c-105.148,-84.187) J1.62@-105.148,-83.765 ; J1.62@-105.447,-83.889 cw(c-105.148,-84.187) J1.62@-105.148,-83.765 ; J1.62@-105.447,-83.641 ccw(c-105.148,-83.342) J1.62@-105.148,-83.765 ; J1.62@-105.447,-83.641 ccw(c-105.148,-83.342) J1.62@-105.148,-83.765 ; J1.62@-105.447,-83.641 ccw(c-105.148,-83.342) J1.62@-105.148,-83.765 ; J1.62@-105.341,-83.995 cw(c-104.786,-84.549) -104.786,-83.765 ; J1.62@-105.341,-83.995 cw(c-104.786,-84.549) -104.786,-83.765 ; J1.62@-105.341,-83.995 cw(c-104.786,-84.549) -104.786,-83.765 ; J1.62@-105.341,-83.535 ccw(c-104.786,-82.98) -104.786,-83.765 ; J1.62@-105.341,-83.535 ccw(c-104.786,-82.98) -104.786,-83.765 ; J1.62@-105.341,-83.535 ccw(c-104.786,-82.98) -104.786,-83.765 ; J1.62@-105.397,-83.616 ccw(c-105.037,-83.255) -105.037,-83.765 cw(c-105.037,-83.255) J1.62@-105.397,-83.616 ; J1.62@-105.291,-83.969 cw(c-104.798,-84.463) -104.798,-83.765 ccw(c-104.798,-84.463) J1.62@-105.291,-83.969 ; J1.62@-105.291,-83.51 ccw(c-104.675,-82.893) -104.675,-83.765 cw(c-104.675,-82.893) J1.62@-105.291,-83.51
EINT0: CON3.9 J1.54 RA1.3 | length 132.5
  Top Layer w0.15: CON3.9@-160.067,-95.106 -158.194,-95.106 -150.7,-102.6 v1(-123.3,-102.6) ; v1@-123.388,-102.688 ccw(c-123.602,-102.902) -123.602,-102.6 ccw(c-123.602,-102.298) v1@-123.388,-102.512 ; RA1.3@-111.42,-76.976 v1(-109.7,-76.976) -109.124,-76.976 -108.086,-78.014 -106.216,-78.014 J1.54@-105.571,-78.659 ; v1@-109.788,-77.064 ccw(c-110.002,-77.278) -110.002,-76.976 ccw(c-110.002,-76.674) v1@-109.788,-76.888 ; v1@-109.612,-77.064 cw(c-109.398,-77.278) -109.398,-76.976 cw(c-109.398,-76.674) v1@-109.612,-76.888 ; -106.217,-78.035 J1.54@-105.571,-78.681 ; CON3.9@-159.802,-95.372 cw(c-159.162,-96.012) -159.162,-95.106 ; CON3.9@-159.802,-95.372 cw(c-159.162,-96.012) -159.162,-95.106 ; CON3.9@-159.802,-95.372 cw(c-159.162,-96.012) -159.162,-95.106 ; CON3.9@-159.802,-95.372 cw(c-159.162,-96.012) -159.162,-95.106 ; CON3.9@-159.802,-95.372 cw(c-159.162,-96.012) -159.162,-95.106 ; CON3.9@-159.802,-94.841 ccw(c-159.162,-94.201) -159.162,-95.106 ; CON3.9@-159.802,-94.841 ccw(c-159.162,-94.201) -159.162,-95.106 ; CON3.9@-159.802,-94.841 ccw(c-159.162,-94.201) -159.162,-95.106 ; CON3.9@-159.802,-94.841 ccw(c-159.162,-94.201) -159.162,-95.106 ; CON3.9@-159.802,-94.841 ccw(c-159.162,-94.201) -159.162,-95.106 ; CON3.9@-159.696,-95.478 cw(c-158.8,-96.374) -158.8,-95.106 ; CON3.9@-159.696,-95.478 cw(c-158.8,-96.374) -158.8,-95.106 ; CON3.9@-159.696,-95.478 cw(c-158.8,-96.374) -158.8,-95.106 ; CON3.9@-159.696,-95.478 cw(c-158.8,-96.374) -158.8,-95.106 ; CON3.9@-159.696,-95.478 cw(c-158.8,-96.374) -158.8,-95.106 ; CON3.9@-159.696,-94.735 ccw(c-158.8,-93.839) -158.8,-95.106 ; CON3.9@-159.696,-94.735 ccw(c-158.8,-93.839) -158.8,-95.106 ; CON3.9@-159.696,-94.735 ccw(c-158.8,-93.839) -158.8,-95.106 ; CON3.9@-159.696,-94.735 ccw(c-158.8,-93.839) -158.8,-95.106 ; CON3.9@-159.696,-94.735 ccw(c-158.8,-93.839) -158.8,-95.106 ; -123.722,-102.6 cw(c-123.722,-103.022) v1@-123.424,-102.724 ; -123.722,-102.6 ccw(c-123.722,-102.178) v1@-123.424,-102.476 ; -123.722,-102.6 cw(c-123.722,-103.022) v1@-123.424,-102.724 ; -123.722,-102.6 ccw(c-123.722,-102.178) v1@-123.424,-102.476 ; -123.722,-102.6 cw(c-123.722,-103.022) v1@-123.424,-102.724 ; -123.722,-102.6 ccw(c-123.722,-102.178) v1@-123.424,-102.476 ; -123.722,-102.6 ccw(c-123.722,-102.178) v1@-123.424,-102.476 ; -123.722,-102.6 cw(c-123.722,-103.022) v1@-123.424,-102.724 ; RA1.3@-111.038,-77.1 cw(c-110.739,-77.398) -110.739,-76.976 ; RA1.3@-111.038,-77.1 cw(c-110.739,-77.398) -110.739,-76.976 ; RA1.3@-111.038,-77.1 cw(c-110.739,-77.398) -110.739,-76.976 ; RA1.3@-111.038,-77.1 cw(c-110.739,-77.398) -110.739,-76.976 ; RA1.3@-111.038,-77.1 cw(c-110.739,-77.398) -110.739,-76.976 ; RA1.3@-111.038,-76.852 ccw(c-110.739,-76.553) -110.739,-76.976 ; RA1.3@-111.038,-76.852 ccw(c-110.739,-76.553) -110.739,-76.976 ; RA1.3@-111.038,-76.852 ccw(c-110.739,-76.553) -110.739,-76.976 ; RA1.3@-111.038,-76.852 ccw(c-110.739,-76.553) -110.739,-76.976 ; RA1.3@-111.038,-76.852 ccw(c-110.739,-76.553) -110.739,-76.976 ; -110.122,-76.976 cw(c-110.122,-77.398) v1@-109.824,-77.1 ; -110.122,-76.976 ccw(c-110.122,-76.553) v1@-109.824,-76.852 ; -110.122,-76.976 cw(c-110.122,-77.398) v1@-109.824,-77.1 ; -110.122,-76.976 ccw(c-110.122,-76.553) v1@-109.824,-76.852 ; -110.122,-76.976 cw(c-110.122,-77.398) v1@-109.824,-77.1 ; -110.122,-76.976 ccw(c-110.122,-76.553) v1@-109.824,-76.852 ; -110.122,-76.976 ccw(c-110.122,-76.553) v1@-109.824,-76.852 ; -110.122,-76.976 cw(c-110.122,-77.398) v1@-109.824,-77.1 ; -109.278,-76.976 cw(c-109.278,-76.553) -109.576,-76.852 ccw(c-109.278,-76.553) -109.278,-76.976 ; -109.278,-76.976 ccw(c-109.278,-77.398) -109.576,-77.1 cw(c-109.278,-77.398) -109.278,-76.976 ; -106.126,-78.126 cw(c-106.68,-78.681) J1.54@-105.896,-78.681 ; -106.126,-78.126 ccw(c-105.571,-77.572) J1.54@-105.571,-78.356 ; -106.126,-78.126 cw(c-106.68,-78.681) J1.54@-105.896,-78.681 ; -106.126,-78.126 ccw(c-105.571,-77.572) J1.54@-105.571,-78.356 ; -106.126,-78.126 cw(c-106.68,-78.681) J1.54@-105.896,-78.681 ; -106.126,-78.126 ccw(c-105.571,-77.572) J1.54@-105.571,-78.356 ; J1.54@-105.946,-78.659 ccw(c-106.798,-78.659) -106.195,-78.057 cw(c-106.798,-78.659) J1.54@-105.946,-78.659 ; J1.54@-105.946,-78.659 ccw(c-106.851,-78.659) -106.211,-78.019 cw(c-106.851,-78.659) J1.54@-105.946,-78.659 ; J1.54@-105.87,-78.382 cw(c-106.168,-78.681) J1.54@-105.746,-78.681 ; J1.54@-105.87,-78.382 ccw(c-105.571,-78.084) J1.54@-105.571,-78.506 ; J1.54@-105.87,-78.382 cw(c-106.168,-78.681) J1.54@-105.746,-78.681 ; J1.54@-105.87,-78.382 ccw(c-105.571,-78.084) J1.54@-105.571,-78.506 ; J1.54@-105.87,-78.382 cw(c-106.168,-78.681) J1.54@-105.746,-78.681 ; J1.54@-105.87,-78.382 ccw(c-105.571,-78.084) J1.54@-105.571,-78.506 ; J1.54@-105.796,-78.659 ccw(c-106.286,-78.659) -105.939,-78.313 cw(c-106.286,-78.659) J1.54@-105.796,-78.659 ; J1.54@-105.796,-78.659 ccw(c-106.339,-78.659) -105.955,-78.275 cw(c-106.339,-78.659) J1.54@-105.796,-78.659 ; J1.54@-105.621,-78.334 cw(c-105.621,-77.618) -106.128,-78.124 ccw(c-105.621,-77.618) J1.54@-105.621,-78.334 ; J1.54@-105.621,-78.334 cw(c-105.621,-77.67) -106.09,-78.14 ccw(c-105.621,-77.67) J1.54@-105.621,-78.334
  Bottom Layer w0.15: v1@-123.388,-102.512 ccw(c-123.602,-102.298) -123.3,-102.298 ccw(c-122.998,-102.298) v1@-123.212,-102.512 ; v1(-123.3,-102.6) -123.3,-78.6 -121.676,-76.976 v1(-109.7,-76.976) ; v1@-109.788,-77.064 ccw(c-110.002,-77.278) -110.002,-76.976 ccw(c-110.002,-76.674) v1@-109.788,-76.888 ; v1@-123.424,-102.476 ccw(c-123.722,-102.178) -123.3,-102.178 ; v1@-123.424,-102.476 ccw(c-123.722,-102.178) -123.3,-102.178 ; v1@-123.424,-102.476 ccw(c-123.722,-102.178) -123.3,-102.178 ; v1@-123.424,-102.476 ccw(c-123.722,-102.178) -123.3,-102.178 ; -123.3,-102.178 ccw(c-122.878,-102.178) v1@-123.176,-102.476 ; -123.3,-102.178 ccw(c-122.878,-102.178) v1@-123.176,-102.476 ; -123.3,-102.178 ccw(c-122.878,-102.178) v1@-123.176,-102.476 ; -123.3,-102.178 ccw(c-122.878,-102.178) v1@-123.176,-102.476 ; -110.122,-76.976 cw(c-110.122,-77.398) v1@-109.824,-77.1 ; -110.122,-76.976 ccw(c-110.122,-76.553) v1@-109.824,-76.852 ; -110.122,-76.976 cw(c-110.122,-77.398) v1@-109.824,-77.1 ; -110.122,-76.976 ccw(c-110.122,-76.553) v1@-109.824,-76.852 ; -110.122,-76.976 cw(c-110.122,-77.398) v1@-109.824,-77.1 ; -110.122,-76.976 ccw(c-110.122,-76.553) v1@-109.824,-76.852 ; -110.122,-76.976 ccw(c-110.122,-76.553) v1@-109.824,-76.852 ; -110.122,-76.976 cw(c-110.122,-77.398) v1@-109.824,-77.1